# Altium PCB bt-bezel-dvt2-R.PcbDoc
Units mm, origin at the board's own origin, x right, y up, seen from the top; angles counter-clockwise.
Board outline 65.7 x 134.7 mm, 2 copper layers (Top Layer, Bottom Layer), stack 1.571 mm thick; 12 components, 5 nets, 33 pads, 2 vias.
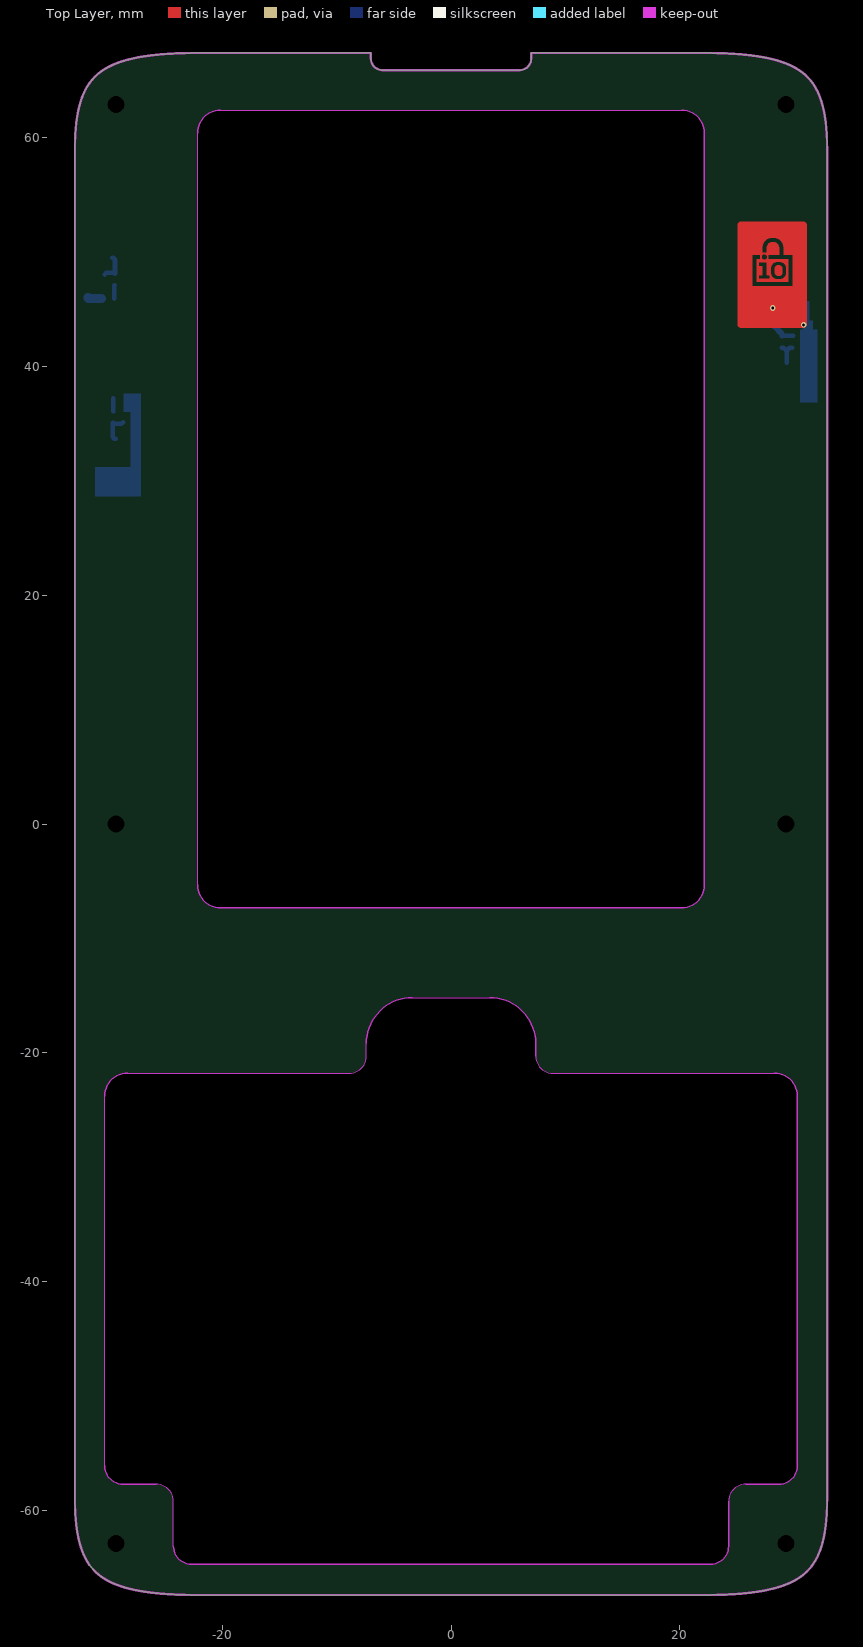
[diagram p0: Top Layer view]
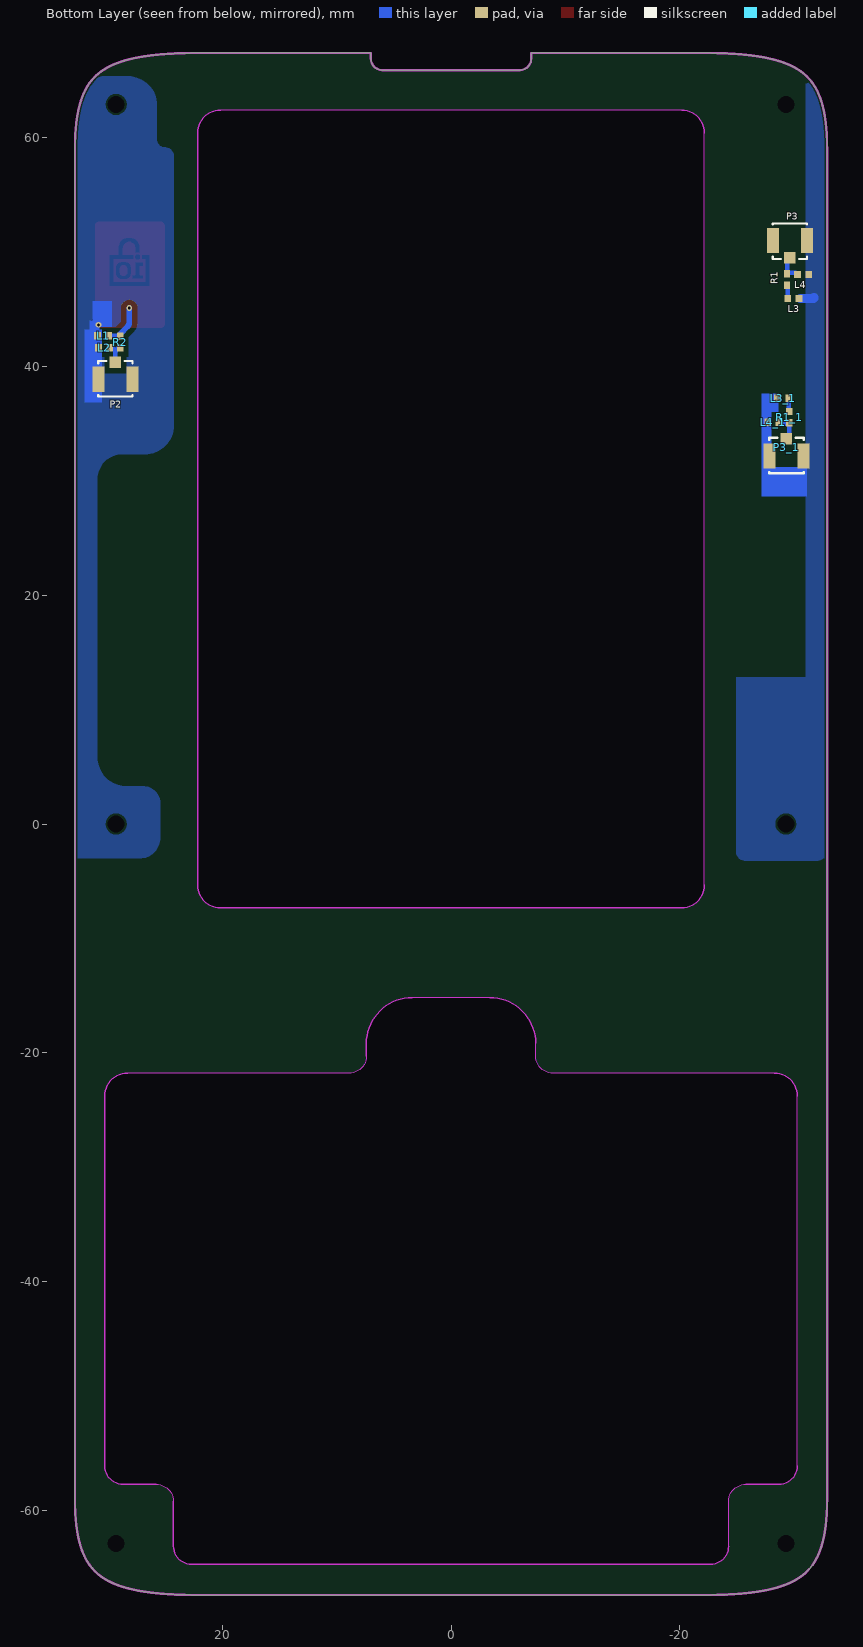
[diagram p1: Bottom Layer view, seen from below]
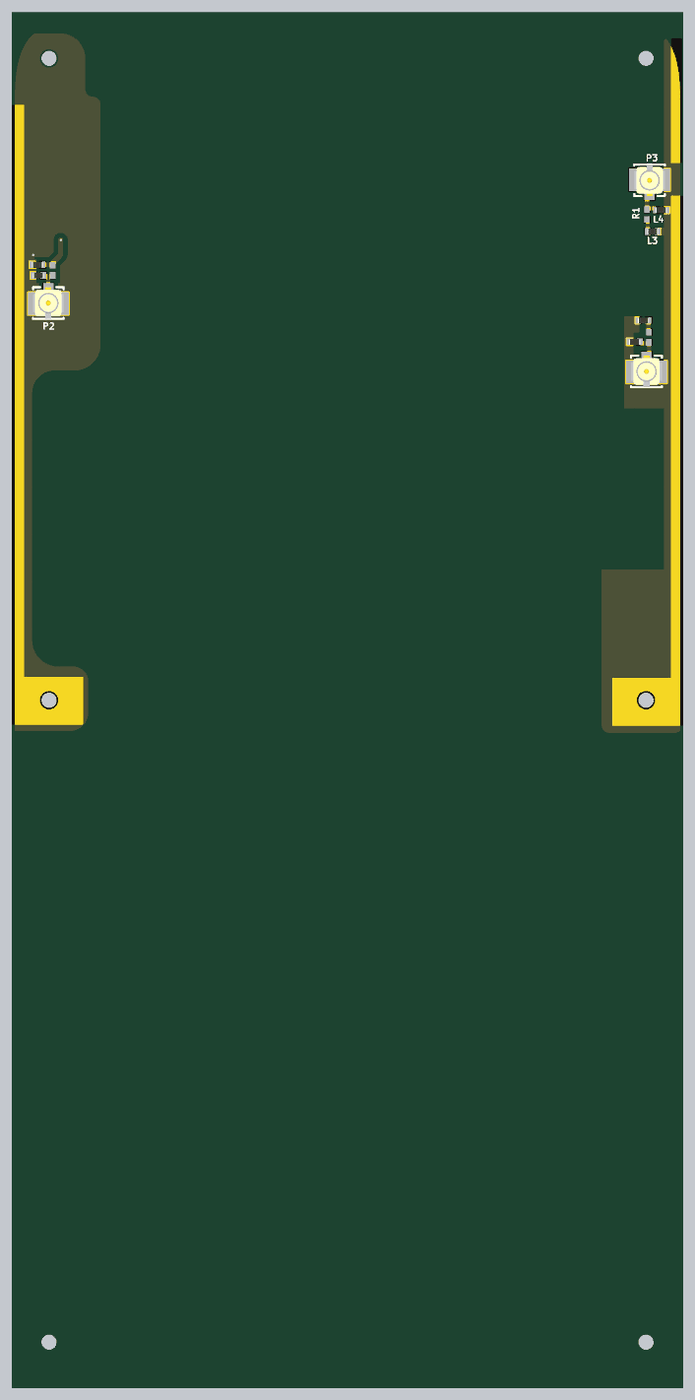
[diagram p2: 3D render of the assembled board from below, using the file's embedded part models]

## Layer stack, top to bottom
Top Layer: signal copper 0.0356
Light blocking FR-4: dielectric 1.5, FR-4, Dk 4.8
Bottom Layer: signal copper 0.0356
Bottom Solder: solder mask 0.0102, Solder Resist, Dk 3.5

## Board outline
1504 vertices, not listed, extent -32.85,-67.35 32.85,67.35
cut-out: -24.25,-63.07 -24.25,-59.17 ccw(c-25.75,-59.17) -25.75,-57.67 -28.65,-57.67 cw(c-28.65,-56.07) -30.25,-56.07 -30.25,-23.77 cw(c-28.25,-23.77) -28.25,-21.77 -8.9,-21.77 ccw(c-8.9,-20.27) -7.4,-20.27 -7.4,-19.17 cw(c-3.4,-19.17) -3.4,-15.17 3.4,-15.17 cw(c3.4,-19.17) 7.4,-19.17 7.4,-20.27 ccw(c8.9,-20.27) 8.9,-21.77 28.25,-21.77 cw(c28.25,-23.77) 30.25,-23.77 30.25,-56.07 cw(c28.65,-56.07) 28.65,-57.67 25.75,-57.67 ccw(c25.75,-59.17) 24.25,-59.17 24.25,-63.07 cw(c22.65,-63.07) 22.65,-64.67 -22.65,-64.67 cw(c-22.65,-63.07)
cut-out: -22.136,-5.322 -22.136,60.35 cw(c-20.136,60.35) -20.136,62.35 20.136,62.35 cw(c20.136,60.35) 22.136,60.35 22.136,-5.322 cw(c20.136,-5.322) 20.136,-7.322 -20.136,-7.322 cw(c-20.136,-5.322)

## Design rules (kind name [scope] priority, off if disabled: settings)
Clearance Clearance_1 [InNetClass('RF') vs InNet('GND')] p1: gap=0.45 ignorepadtopadclearanceinfootprint=FALSE except(0: Arc-Hole Track-Hole SMDPad-Hole THPad-Hole Via-Hole Fill-Hole Poly-Hole Region-Hole Text-Hole)
Clearance [All] p2: gap=0.15 ignorepadtopadclearanceinfootprint=FALSE except(0: Arc-Hole Track-Hole SMDPad-Hole THPad-Hole Via-Hole Fill-Hole Poly-Hole Region-Hole Text-Hole)
ComponentClearance [All] p1 off: gap=0.254 collisioncheckmode=3 verticalgap=0.254 showdistances=FALSE
Height [All] p1 off: minheight=0 maxheight=25.4 prefheight=12.7
PolygonConnect [All] p1: connectstyle=Direct reliefconductorwidth=0.254 reliefentries=4 polygonreliefangle="90 Angle" airgapwidth=0.254
RoomDefinition connectors [InComponentClass('connectors')] p1 off: confinementstyle=ConfineIn formatcopy=TRUE lockcomponents=FALSE outline 34.001,-65.945 33.5,-65.945 33.5,-39.945 34.001,-39.945
RoutingVias [All] p1: holewidth=0.25 width=0.5 viastyle="Through Hole" minholewidth=0.25 minwidth=0.5 maxholewidth=0.5 maxwidth=1
SolderMaskExpansion [All] p1: expansion=0.102 istentingtop=FALSE
Width [All] p1: maxlimit=5 minlimit=0.15 preferedwidth=0.15 minimp=50.000000 maximp=50.000000 favimp=50.000000
28 further rules are at their usual default settings.

## Classes and differential pairs
net class RF: ANT1 ANT2 FEED1 FEED2
component class connectors: L1 L2 L3 L4 P2 P3 R1 R2

## Components (designator, comment, footprint, x,y, rotation, side; value= is the part's Value field where it differs from the comment)
L1 "DNP" B_IND0402 30.385,42.636 r180 bottom value=10mH
L2 "DNP" B_IND0402 30.3,41.6 r180 bottom value=10mH
L3 "DNP" B_IND0402 -29.9,45.9 r0 bottom value=10mH
L3_1 "DNP" B_IND0402 -29,37.2 r180 bottom value=10mH (schematic designator L3)
L4 "DNP" B_IND0402 -30.75,48 r0 bottom value=10mH
L4_1 "DNP" B_IND0402 -28.15,35.1 r180 bottom value=10mH (schematic designator L4)
P2 "U.FL-R-SMT-1(10)" HRS_U.FL 29.316,38.841 r0 bottom
P3 "U.FL-R-SMT-1(10)" HRS_U.FL -29.6,50.957 r180 bottom
P3_1 "U.FL-R-SMT-1(10)" HRS_U.FL -29.3,32.143 r0 bottom (schematic designator P3)
R1 "0 ohm" B_RES0402 -29.35,47.557 r270 bottom value=100k
R1_1 "0 ohm" B_RES0402 -29.55,35.543 r90 bottom value=100k (schematic designator R1)
R2 "0 ohm" B_RES0402 28.9,42.1 r90 bottom value=100k

## Footprints (in the part's own frame and the unit in brackets; to place one, negate y for a bottom-side part, rotate by r counter-clockwise, add the part's x,y. Pads: shape width x height; smd on the part's side, far side on the other; paste and mask are expansions set on the pad)
B_IND0402 [mm] "Inductor 0402"
  rect 0.58x0.64 smd: 1(-0.49,0) 2(0.49,0)
  body extent -0.55,-0.3 0.55,0.3, height 0.6
B_RES0402 [mm] "Resistor 0402"
  rect 0.63x0.55 smd mask+0.07: 1(-0.5,0) 2(0.5,0)
  body extent -0.53,-0.27 0.53,0.28, height 0.4
HRS_U.FL [mm] "6 GHz U.FL connector (ISM band antennas)"
  rect 1.05x2.2 smd: GND(-1.475,0) GND(1.475,0)
  rect 1x1 smd: SIG(0,-1.5)
  silkscreen extent -1.5,-1.6 1.5,1.5, body extent -1.5,-1.6 1.5,1.5, height 1.24

## Part data
L1 L2 L3 L3_1 L4 L4_1: library part Inductor, "Inductor", Code_IEC=1005, Code_JEITA=0402, LatestRevisionDate=29-May-2009, LatestRevisionNote="IPC-7351 Footprint Added.", PackageDescription="Chip Inductor", PackageReference=0402-A, Published=8-Jun-2000, Publisher="Altium Limited"
P2 P3 P3_1: library part BNC, "BNC Elbow Connector", LatestRevisionDate=17-Jul-2002, LatestRevisionNote="Re-released for DXP Platform.", MPN=U.FL-R-SMT-1(10), MYPN=J-U.FL-SMT, Publisher="Altium Limited", VENDOR=HRS
R1 R1_1 R2: library part Res1, "Resistor", LatestRevisionDate=17-Jul-2002, LatestRevisionNote="Re-released for DXP Platform.", PackageReference=AXIAL-0.3, Published=8-Jun-2000, Publisher="Altium Limited"

## Free pads (board coordinates)
  round 1 hole 1.5 unplated mask+0.07: 0(-29.25,-62.85) 0(-29.25,0) 0(-29.25,62.85) 0(29.25,-62.85) 0(29.25,0) 0(29.25,62.85)

## Via types
v1: diameter 0.5, hole 0.25, Top Layer to Bottom Layer, tented both sides, 2 vias

## Nets (pads, with @x,y where several pads share a name; then routed paths per layer and width w, separated by ;. In a path a pad name is that pad's centre, name@x,y a point inside that pad or via, vN(x,y) a via of type N, cw(c..) or ccw(c..) an arc to the next point about the centre after c; other vN are vias at no path point)
ANT1: L1.2 R2.2 | length 3.6
  Bottom Layer w0.4: R2.2@28.883,42.817 28.9,42.8 R2.2@28.91,42.8 ; R2.2@28.91,42.6 R2.2 cw(c28.936,42.6) 28.936,42.636 L1.2
  Bottom Layer w0.5: v1(28.107,45.064) 28.107,43.8 ccw(c28.607,43.8) 28.254,43.446 R2.2@28.883,42.817
  other v1: 30.8,43.6
ANT2: L3.2 R1.2 | length 1.2
  Bottom Layer w0.4: L3.2 -29.41,47.026 cw(c-29.379,47.026) R1.2@-29.379,47.057
FEED1: L2.2 P2.SIG R2.1 | length 2.3
  Bottom Layer w0.4: R2.1 cw(c28.9,41.184) 29.316,41.184 ; P2.SIG@29.316,40.284 P2.SIG 29.316,41.184 ; L2.2 29.732,41.6 ccw(c29.732,41.184) 29.316,41.184
FEED2: L4.2 P3.SIG R1.1 | length 2.5
  Bottom Layer w0.4: L4.2 -30.103,48.157 -29.479,48.157 cw(c-29.479,48.057) R1.1@-29.379,48.057 ; P3.SIG cw(c-29.6,49.207) -29.35,49.207 R1.1
GND: L1.1 L2.1 L3.1 L4.1 P2.GND P3.GND P3_1.GND@-30.775,32.143 | length 1.2
  Bottom Layer w0.8: -31.7,46 ccw(c-31.6,46) -31.6,45.9 L3.1@-30.55,45.9
pads on no net: L3_1.1 L3_1.2 L4_1.1 L4_1.2 P3_1.GND@-27.825,32.143 P3_1.SIG R1_1.1 R1_1.2
copper on no net: | length 3.7
  Bottom Layer w0.4: -29.55,35.043 -29.55,33.893 ccw(c-29.3,33.893) -29.3,33.643 ; -29.521,35.043 ccw(c-29.421,35.043) -29.421,34.943 -28.797,34.943 -28.64,35.1 ; -29.521,36.043 ccw(c-29.521,36.074) -29.49,36.074 -29.49,37.2

## Polygon pours and split planes (outlines as drawn)
GND on Bottom Layer "GND_L02_P003" (solid, remove dead copper, pour order 3): 35.8,65.3 28.2,65.3 ccw(c28.2,62.8) 25.7,62.8 25.7,59.8 cw(c25,59.8) 25,59.1 ccw(c25,58.3) 24.2,58.3 24.2,34.84 ccw(c26.74,34.84) 26.74,32.3 28.7,32.3 cw(c28.7,30.1) 30.9,30.1 30.9,5.84 cw(c28.36,5.84) 28.36,3.3 26.9,3.3 ccw(c26.9,1.8) 25.4,1.8 25.4,-1.2 ccw(c27.2,-1.2) 27.2,-3 34.1,-3 ccw(c34.1,-2.5) 34.6,-2.5
GND on Bottom Layer "GND_L02_P002" (solid, remove dead copper, pour order 2): -24.9,-2.4 cw(c-25.7,-2.4) -25.7,-3.2 -32,-3.2 cw(c-32,-2.3) -32.9,-2.3 -32.9,64.9 cw(c-31.3,64.9) -31.3,66.5 cw(c-31.3,66.2) -31,66.2 -31,37.5 -31,12.8 -24.9,12.8

## Keep-outs
Keep-Out Layer:
  drawing of 1516 lines, arcs and shapes, not listed

## Other copper
Top Layer:
  region: 220 vertices and 0 holes, not listed, extent 28.267,47.894 28.945,48.79
  region net ANT1: 1680 vertices and 4 holes, not listed, extent 25.024,43.352 31.072,52.608
  region: -19.2,-2.9
  region: -19.2,-2.9
  region: -19.2,-2.9
  region: -14.708,-11.763
  region: -14.708,-11.763
  region: -14.708,-11.763
Bottom Layer:
  rectangle net GND: -31.1,28.6 -27.1,31.2
  rectangle: -28.6,36 -27.1,37.6
  rectangle: -28,31.1 -27.1,37.5
  rectangle net GND: 30.7,42.7 31.6,44
  rectangle net GND: 30.5,36.8 32,43.2
  rectangle net GND: 29.6,43.4 31.3,45.7

## Silkscreen, mask and mechanical layers (free items; w line width, h text height)
Bottom Solder:
  rectangle: -32.8,52.6 -31.7,64.8
  rectangle: -32.934,-2.489 -25.934,2.211
  rectangle: -32.9,2.1 -31.7,49.4
  rectangle: 31.7,1.8 32.9,58.3
  rectangle: 25.9,-2.4 32.9,2.3
Mechanical 1:
  circle w0.1: c-29.25,-62.85 r0.75
  circle w0.1: c-29.25,0 r0.75
  circle w0.1: c29.25,0 r0.75
  circle w0.1: c29.25,62.85 r0.75
  circle w0.1: c-29.25,62.85 r0.75
  circle w0.1: c29.25,-62.85 r0.75
  lines w0.1: -32.85,-59 -32.811,-60.349 -32.67,-61.689 -32.38,-63.01 -32.023,-63.954 -31.499,-64.824 -30.797,-65.553 -29.952,-66.111 -28.441,-66.703 -26.854,-67.046 -25.241,-67.234 -23.623,-67.325 -22,-67.35 22,-67.35 23.629,-67.325 25.253,-67.233 26.871,-67.043 28.461,-66.698 29.975,-66.099 30.819,-65.535 31.522,-64.794 32.038,-63.922 32.393,-62.968 32.674,-61.665 32.811,-60.34 32.85,-59 32.85,59 32.811,60.349 32.67,61.689 32.38,63.01 32.023,63.954 31.499,64.824 30.797,65.553 29.952,66.111 28.441,66.703 26.854,67.046 25.241,67.234 23.623,67.325 22,67.35 7,67.35 7,66.85 cw(c6,66.85) 6,65.85 -6,65.85 cw(c-6,66.85) -7,66.85 -7,67.35 -22,67.35 -23.629,67.325 -25.253,67.233 -26.871,67.043 -28.461,66.698 -29.975,66.099 -30.819,65.535 -31.522,64.794 -32.038,63.922 -32.393,62.968 -32.674,61.665 -32.811,60.34 -32.85,59 -32.85,-59 ; -31.55,-59.55 ccw(c-30.55,-59.55) -30.55,-60.55 -26.55,-60.55 cw(c-26.55,-61.55) -25.55,-61.55 -25.55,-64.97 ccw(c-24.55,-64.97) -24.55,-65.97 24.55,-65.97 ccw(c24.55,-64.97) 25.55,-64.97 25.55,-61.55 cw(c26.55,-61.55) 26.55,-60.55 30.55,-60.55 ccw(c30.55,-59.55) 31.55,-59.55 31.55,-23.77 ccw(c28.25,-23.77) 28.25,-20.47 13.461,-20.47 13.461,-17.47 ccw(c12.461,-17.47) 12.461,-16.47 7.961,-16.47 ccw(c3.4,-19.17) 5.5,-14.304 5.5,-13.141 22.846,-13.141 ccw(c24.083,-12.964) 24.26,-11.727 24.26,63.095 ccw(c24.083,64.332) 22.846,64.509 -22.532,64.509 ccw(c-23.51,63.73) -24.26,62.73 -24.26,-11.727 ccw(c-24.083,-12.964) -22.846,-13.141 -12.75,-13.141 -12.75,-14.941 ccw(c-12.25,-14.941) -12.25,-15.441 -9.75,-15.441 ccw(c-9.75,-14.941) -9.25,-14.941 -9.25,-13.141 -5.5,-13.141 -5.5,-14.304 ccw(c-3.4,-19.17) -7.961,-16.47 -12.461,-16.47 ccw(c-12.461,-17.47) -13.461,-17.47 -13.461,-20.47 -28.25,-20.47 ccw(c-28.25,-23.77) -31.55,-23.77 -31.55,-59.55 ; -30.25,-56.07 ccw(c-28.65,-56.07) -28.65,-57.67 -25.75,-57.67 cw(c-25.75,-59.17) -24.25,-59.17 -24.25,-63.07 ccw(c-22.65,-63.07) -22.65,-64.67 22.65,-64.67 ccw(c22.65,-63.07) 24.25,-63.07 24.25,-59.17 cw(c25.75,-59.17) 25.75,-57.67 28.65,-57.67 ccw(c28.65,-56.07) 30.25,-56.07 30.25,-23.77 ccw(c28.25,-23.77) 28.25,-21.77 8.9,-21.77 cw(c8.9,-20.27) 7.4,-20.27 7.4,-19.17 ccw(c3.4,-19.17) 3.4,-15.17 -3.4,-15.17 ccw(c-3.4,-19.17) -7.4,-19.17 -7.4,-20.27 cw(c-8.9,-20.27) -8.9,-21.77 -28.25,-21.77 ccw(c-28.25,-23.77) -30.25,-23.77 -30.25,-56.07 ; -22.136,-5.322 ccw(c-20.136,-5.322) -20.136,-7.322 20.136,-7.322 ccw(c20.136,-5.322) 22.136,-5.322 22.136,60.35 ccw(c20.136,60.35) 20.136,62.35 -20.136,62.35 ccw(c-20.136,60.35) -22.136,60.35 -22.136,-5.322
  lines w0.2: 21.6,-9.4 40.5,-3.4
  text "1mm step milling around this surface on back side" at 41.4,-9.158 h1.5
Mechanical 2:
  drawing of 168 lines, arcs and shapes, not listed
  text "Chamfer 30 degree / 0.5mm from top side" at -103,69.601 h1.5
  text "Chamfer 15 degree / 1mm from top side" at 40.5,-31.549 h1.5
Dimensions:
  drawing of 213 lines, arcs and shapes, not listed
  text "Profile of cross section line C-C, showing countersink hole and back mill" at -47,98.081 h1.5
  text "https://home.sandiego.edu/~ekim/e194rfs01/jwmatcher/matcher2.html calculator / 1. measure antenna with no network, get smitch chart parameters @ desired center BW / 2. plug into calculator as \"load resistance/reactance\" / 3. use result" at 47.65,82.475 h1.5
  text "Profile of cross section line B-B, showing 30 degree chamfer from top and 1mm back-mill" at -48.2,76.981 h1.5
  text "Note: 6x countersink hole 45 degree, see section C-C" at 41.6,72.781 h1.5
  text "Tuning notes: antenna should be 12.10mm x 6.05mm, needs \"pi\" network with 1.8nH series /3.9pF 2xshunt matching network." at 49.55,62.587 h1.5
  text "Layer" at 50.288,57.096 h1.52
  text "Name" at 60.7,57.096 h1.52
  text "Material" at 91.679,57.096 h1.52
  text "Thickness" at 113.517,57.096 h1.52
  text "Constant" at 130.023,57.096 h1.52
  text "Board Layer Stack" at 144.497,57.096 h1.52
  text "C" at -43.284,54.913 h3.5
  text "C" at 40.034,54.913 h3.5
  text "1" at 50.288,54.048 h1.52
  text "Top Layer" at 60.7,54.048 h1.52
  text "Copper" at 91.679,54.048 h1.52
  text "0.036mm" at 113.517,54.048 h1.52
  text "Light blocking FR-4" at 60.7,51 h1.52
  text "FR-4" at 91.679,51 h1.52
  text "1.500mm" at 113.517,51 h1.52
  text "4.8" at 130.023,51 h1.52
  text "2" at 50.288,47.952 h1.52
  text "Bottom Layer" at 60.7,47.952 h1.52
  text "Copper" at 91.679,47.952 h1.52
  text "0.036mm" at 113.517,47.952 h1.52
  text "Bottom Solder" at 60.7,44.904 h1.52
  text "Solder Resist" at 91.679,44.904 h1.52
  text "0.010mm" at 113.517,44.904 h1.52
  text "3.5" at 130.023,44.904 h1.52
  text "Bottom Overlay" at 60.7,41.856 h1.52
  text "Finish: immersion gold" at 50.8,35.2 h1.5
  text "Top side no solder mask or silkscreen" at 50.7,28.581 h1.5
  text "Bottom side clear soldermask, light gray silkscreen" at 51.1,23.581 h1.5
  text "B" at -42.485,22.84 h3.5
  text "B" at 39.806,22.84 h3.5
  text "Please see .GM1 and .GM2 for chamfer and step-milling instructions" at 50.8,16.562 h1.5
  text "A" at -42.866,-43.045 h3.5
  text "A" at 40.815,-43.045 h3.5
  text "Profile of cross section line A-A, showing 15 degree chamfer from top + 1mm back-mill" at -35.7,-85.719 h1.5
Route Tool Path:
  drawing of 1516 lines, arcs and shapes, not listed

## Dimensions
-24.234,74.18 to -22.136,74.18 on Dimensions
-24.234,73.18 to -24.234,74.18 on Dimensions
-32.85,73.18 to -32.85,74.68 on Dimensions
-22.636,74.68 to -22.136,74.391 on Dimensions
-30.5,94.919 to -30,94.419 on Dimensions
-28.5,94.419 to -28,94.919 on Dimensions
-28.5,93.419 to -30,93.419 on Dimensions
-28,94.919 to -30.5,94.919 on Dimensions
-31.25,-74.026 to -30.25,-74.294 on Dimensions
-31.55,-75.526 to -30.25,-74.526 on Dimensions
-32.85,-75.526 to -32.85,-74.026 on Dimensions
-30.25,-74.526 to -31.55,-75.526 on Dimensions